# Altium PCB PCB1.PcbDoc
Units mil, origin at the board's own origin, x right, y up, seen from the top; angles counter-clockwise.
Board outline 1982 x 2318 mil, 4 copper layers (Top Layer, GND, GND_SIG, Bottom Layer), stack 23.756 mil thick; 61 components, 52 nets, 290 pads, 248 vias.
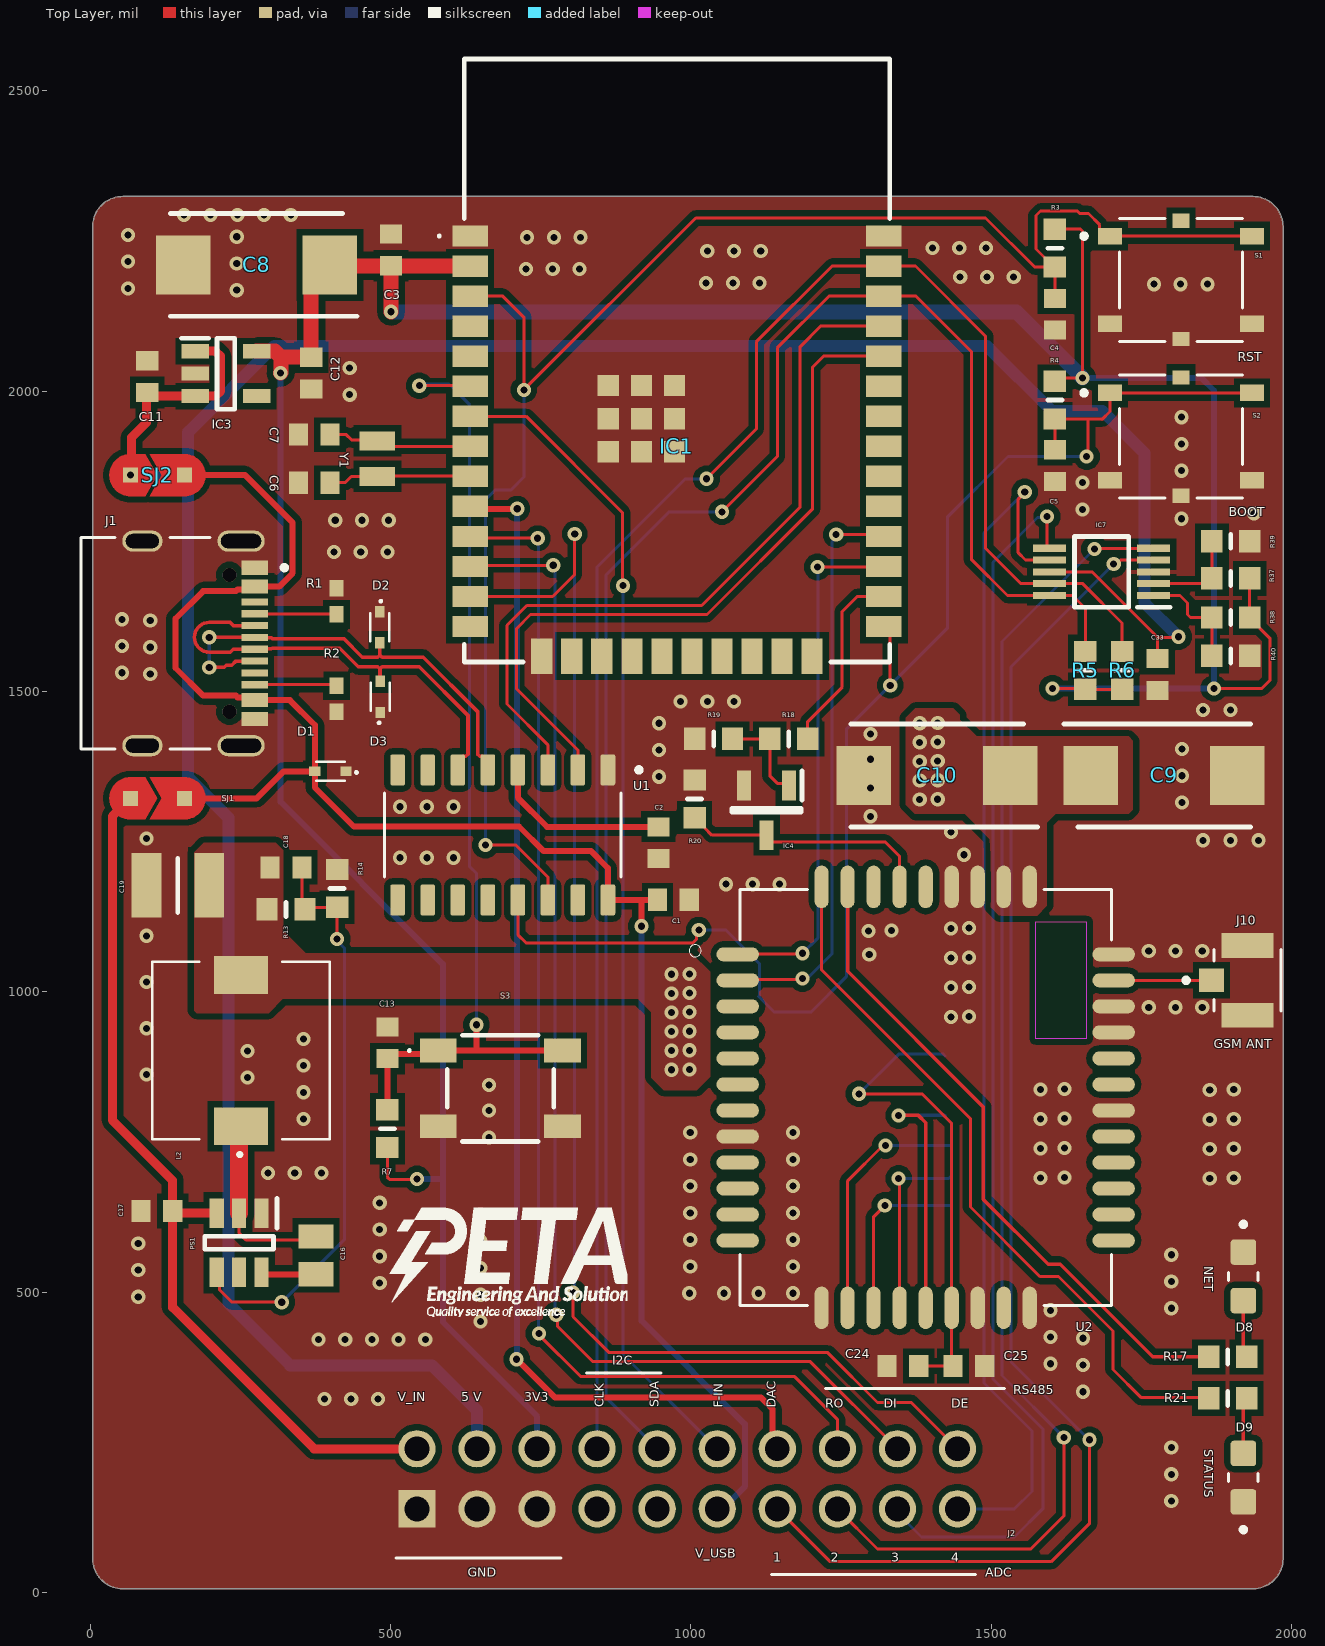
[diagram p0: Top Layer view]
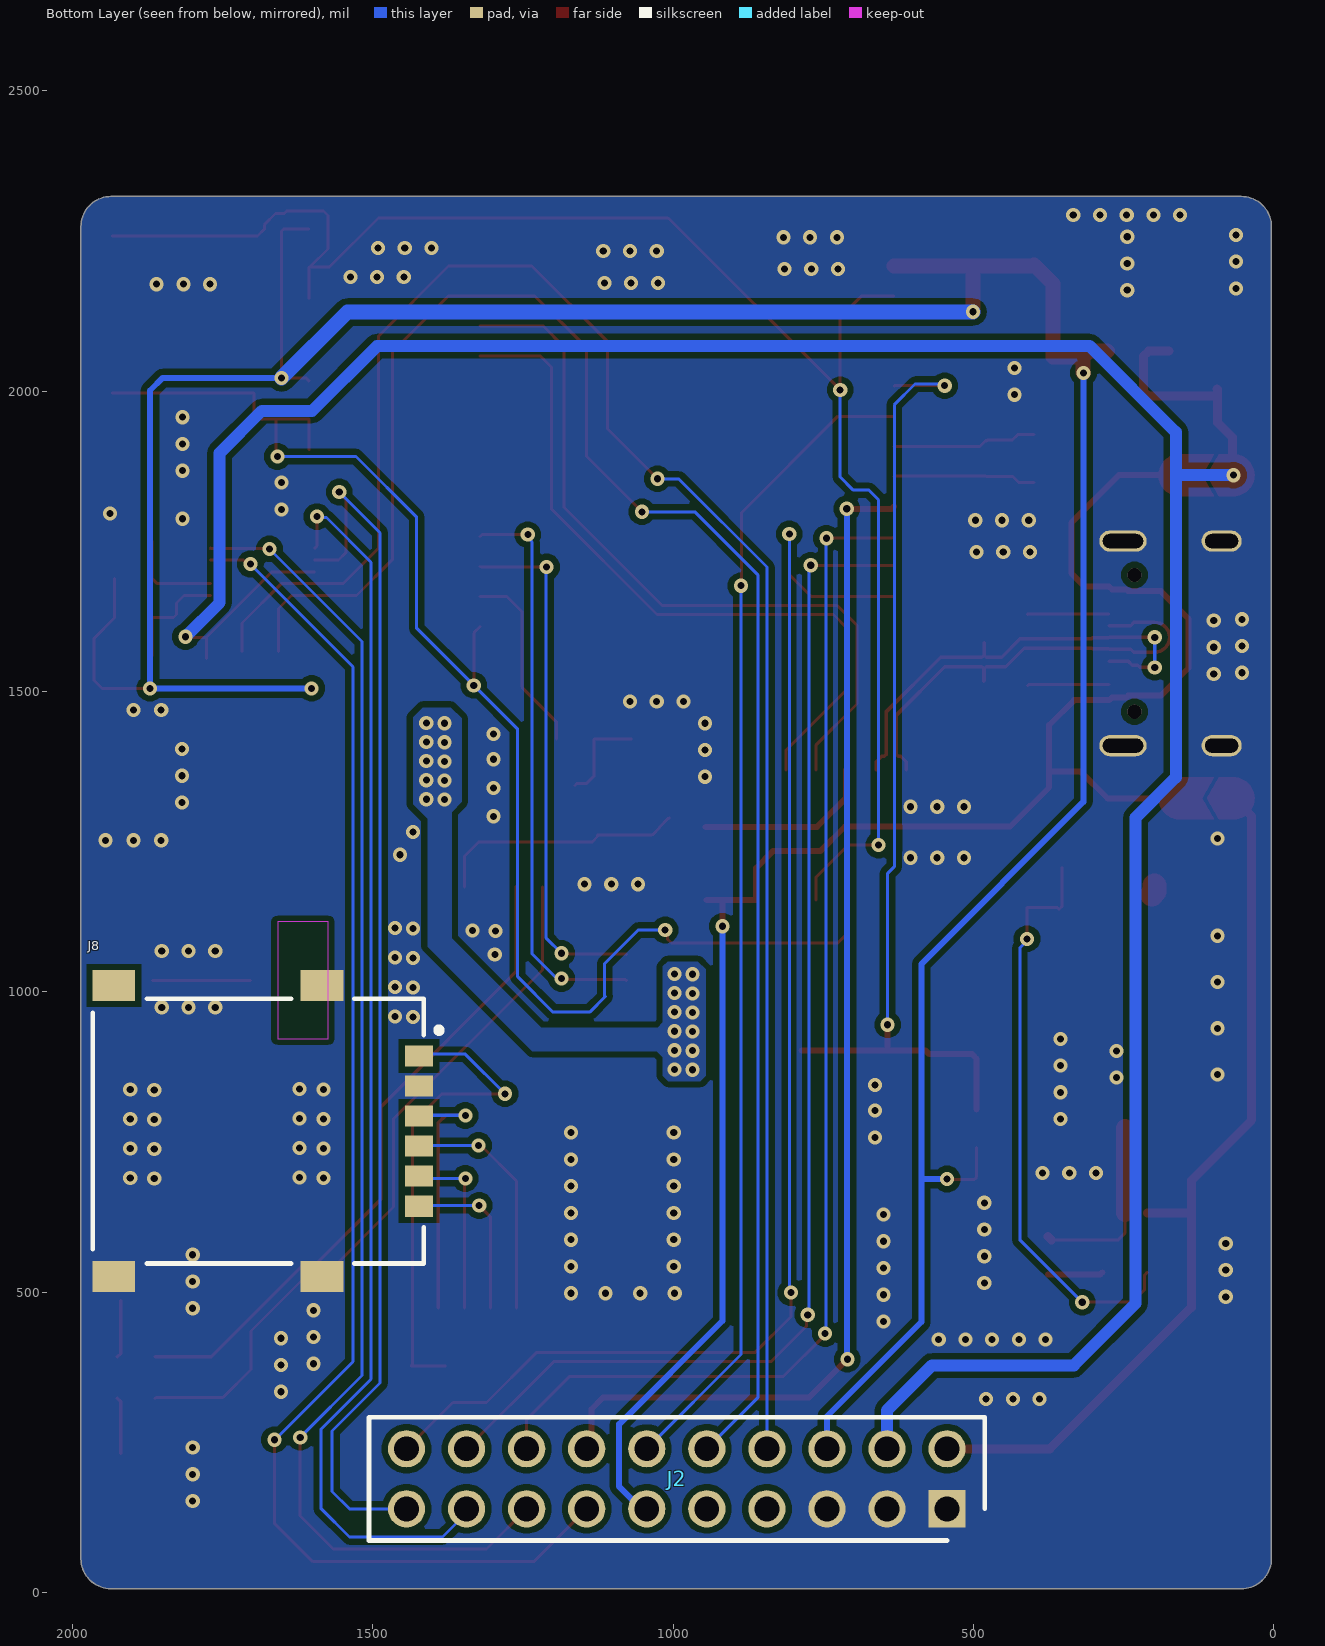
[diagram p1: Bottom Layer view, seen from below]
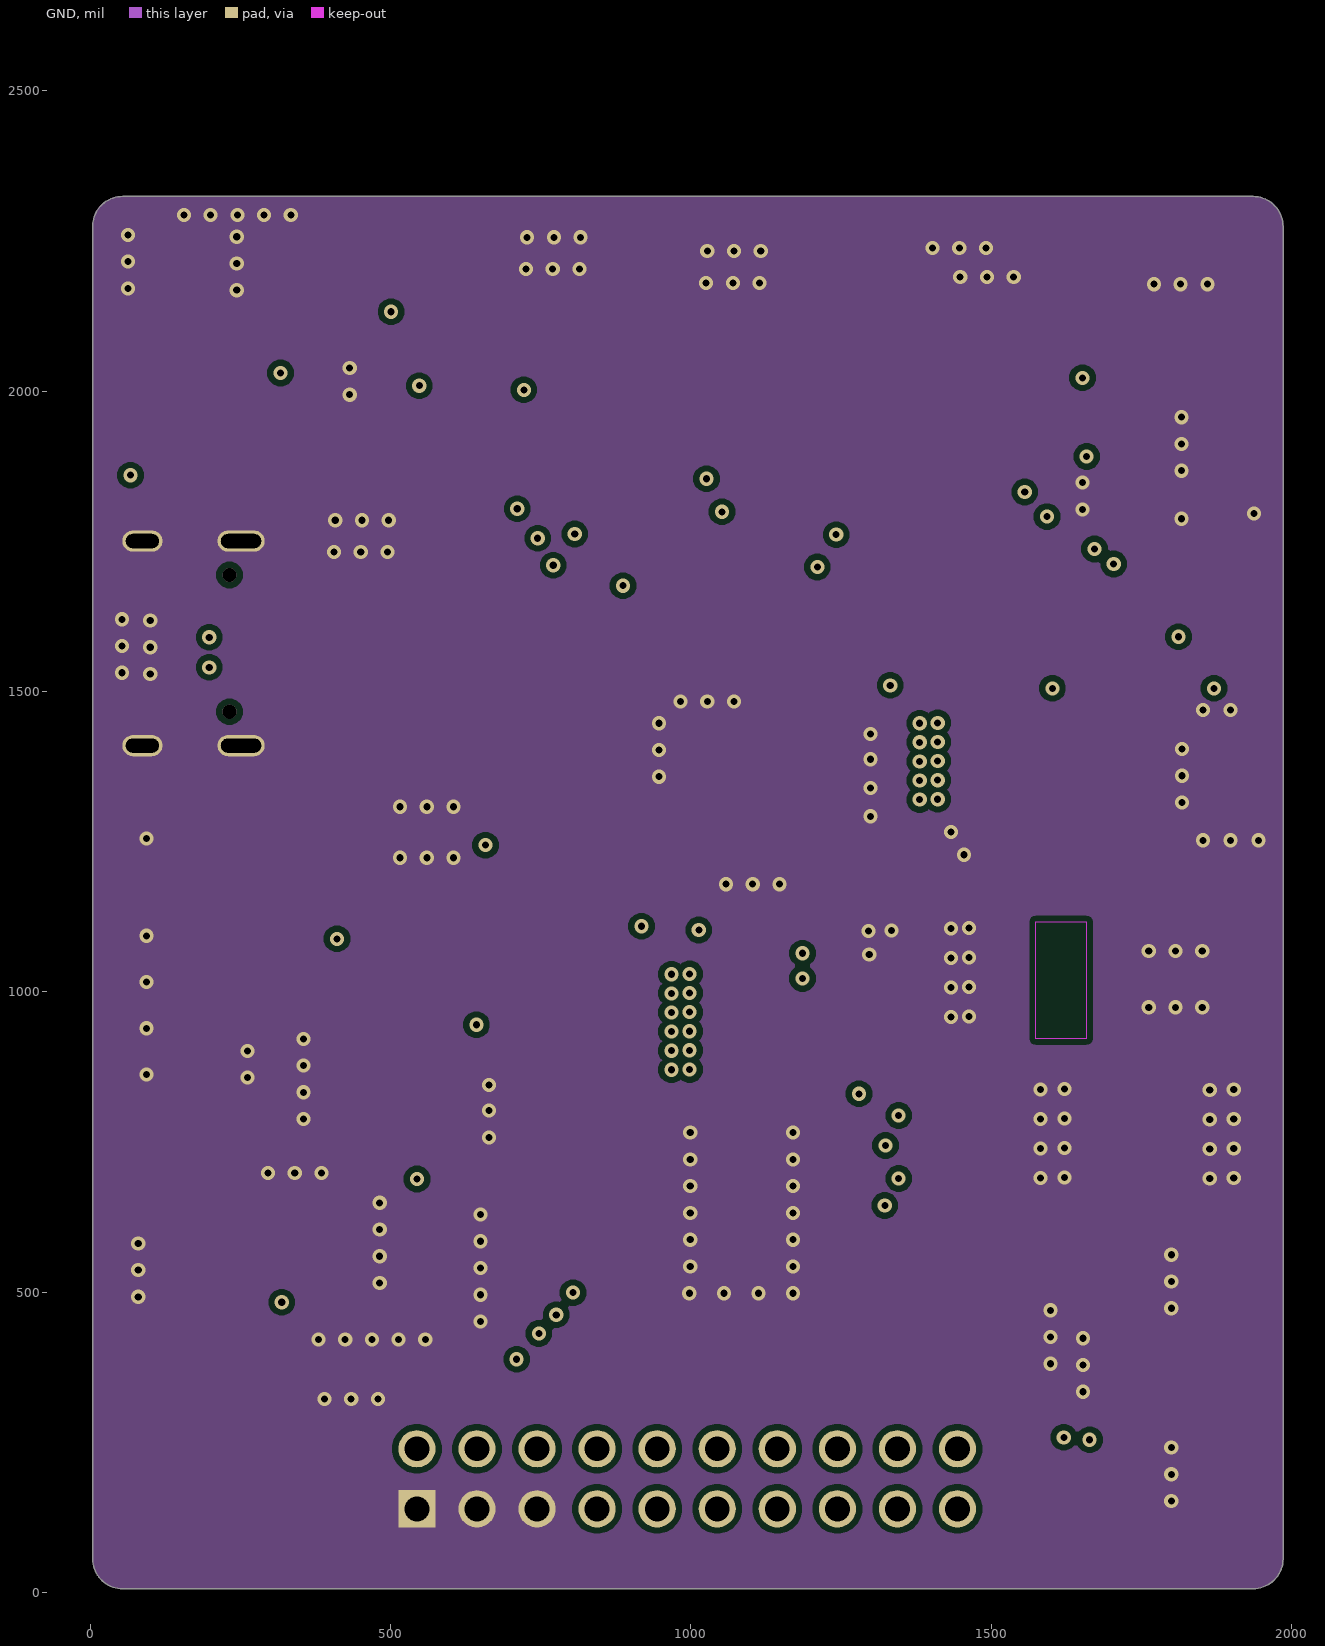
[diagram p2: GND]
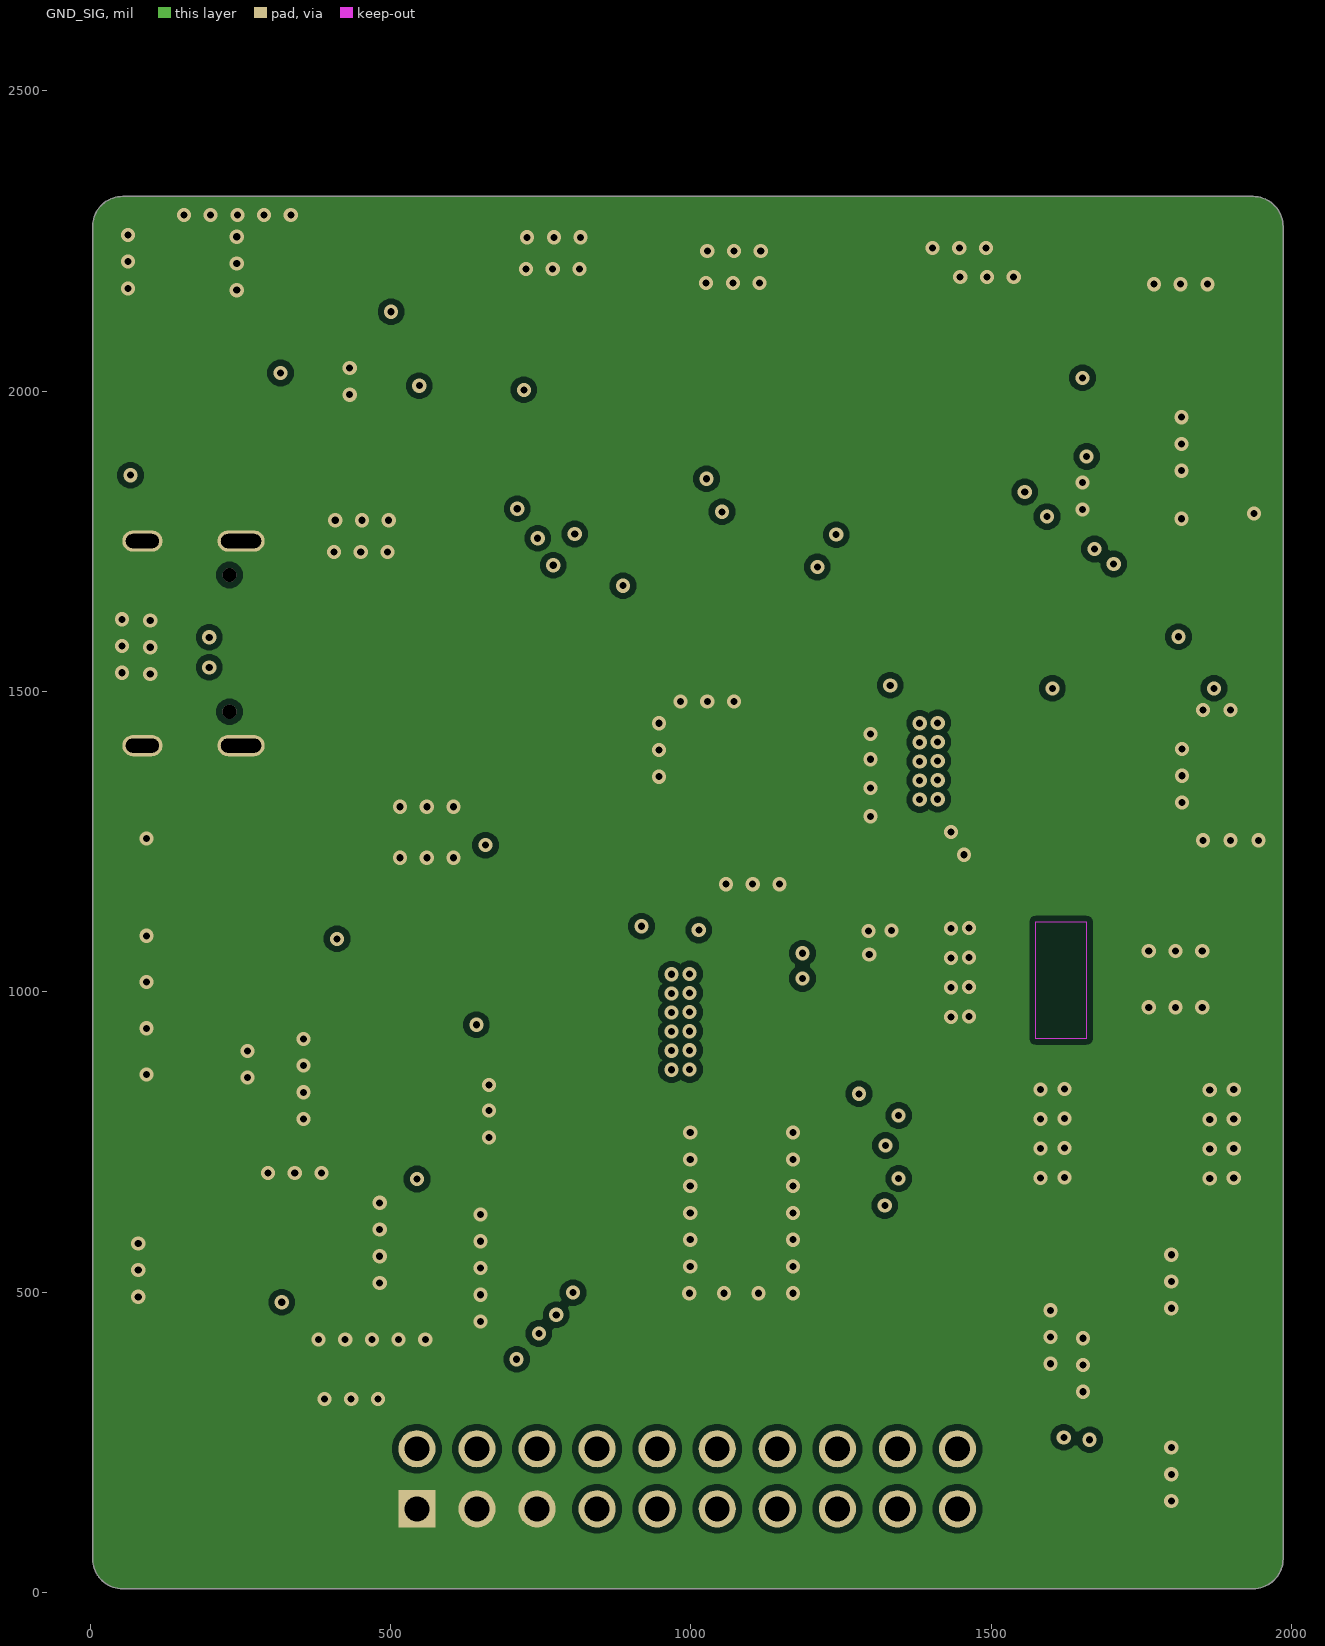
[diagram p3: GND_SIG]
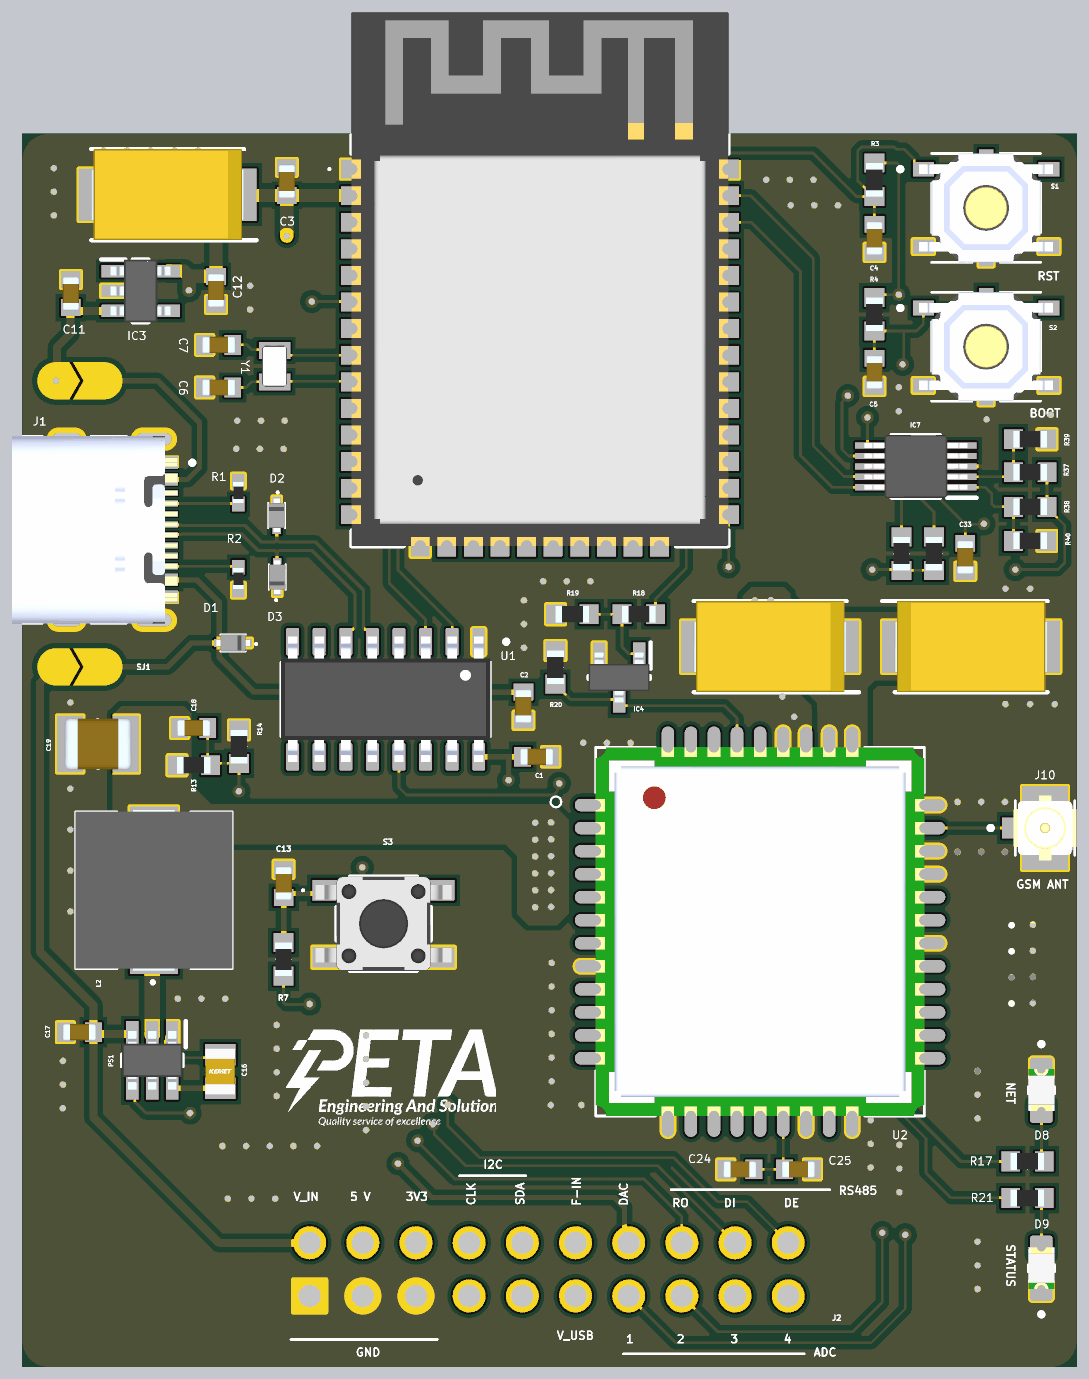
[diagram p4: 3D render of the assembled board from above, using the file's embedded part models]

## Layer stack, top to bottom
Top Solder: solder mask 0.4, Solder Resist, Dk 3.5
Top Layer: signal copper 1.4
Dielectric 2: prepreg 2.8, PP-006, Dk 4.1
GND: signal copper 1.378
Dielectric 1: dielectric 12.6, FR-4, Dk 4.8
GND_SIG: signal copper 1.378
Dielectric 3: prepreg 2.8, PP-006, Dk 4.1
Bottom Layer: signal copper 1.4
Bottom Solder: solder mask 0.4, Solder Resist, Dk 3.5

## Board outline
4,56 4,1120 4,2274 cw(c54,2274) 54,2324 1936,2324 cw(c1936,2274) 1986,2274 1986,56 cw(c1936,56) 1936,6 54,6 cw(c54,56)

## Design rules (kind name [scope] priority, off if disabled: settings)
Clearance [All] p1: gap=10 ignorepadtopadclearanceinfootprint=TRUE except(0: Arc-Hole Track-Hole SMDPad-Hole THPad-Hole Via-Hole Fill-Hole Poly-Hole Region-Hole Text-Hole)
DiffPairsRouting [All] p1: maxlimit=19.68 minlimit=5.91 mostfreqgap=10 toplayer_minwidth=5.91 toplayer_maxwidth=15 toplayer_prefwidth=15 midlayer1_mingap=10 midlayer1_maxgap=10 midlayer1_minwidth=15 midlayer1_maxwidth=15 midlayer1_prefwidth=15 midlayer2_mingap=10 midlayer2_maxgap=10 midlayer2_minwidth=15 midlayer2_maxwidth=15 midlayer2_prefwidth=15 bottomlayer_minwidth=5.91 bottomlayer_maxwidth=15 bottomlayer_prefwidth=15 maxuncoupledlength=500
PlaneConnect [All] p1: planeconnectstyle=Direct reliefexpansion=20 reliefentries=4 reliefconductorwidth=10 reliefairgap=10
PolygonConnect [All] p1: connectstyle=Direct reliefconductorwidth=10 reliefentries=4 polygonreliefangle="90 Angle" airgapwidth=10
RoutingVias [All] p1: holewidth=11.81 width=23.62 viastyle="Through Hole" minholewidth=11.81 minwidth=23.62 maxholewidth=118.11 maxwidth=236.22
SolderMaskExpansion [All] p1: expansion=4 istentingtop=FALSE
Width [All] p1: maxlimit=80 minlimit=5 preferedwidth=10
28 further rules are at their usual default settings.

## Classes and differential pairs
component class PWR: C11 C12 C16 C17 C18 C19 IC3 L2 PS1 R13 R14 SJ1 SJ2
component class programmer: C1 C2 D1 D2 D3 J1 R1 R2 U1
component class MCU: C3 C4 C5 C6 C7 C8 C13 IC1 J2 R3 R4 R5 R6 R7 S1 S2 S3 Y1
component class GSM: C9 C10 C24 C25 D8 D9 IC4 J8 J10 R17 R18 R19 R20 R21 U2
component class ADC: C33 IC7 R37 R38 R39 R40
differential pair USB: +USB_P -USB_N

## Components (designator, comment, footprint, x,y, rotation, side; value= is the part's Value field where it differs from the comment)
C1 "0.1 uF" CAP0603 971,1153 r180 top
C2 "0.1 uF" CAP0603 946,1248 r90 top
C3 "0.1 uF" CAP0603 501,2235 r90 top
C4 "0.1 uF" CAP0603 1606.2,2128 r270 top
C5 "0.1 uF" CAP0603 1606.2,1876 r270 top
C6 "1.5 pF" CAP0603 373,1847.47 r0 top
C7 "1.5 pF" CAP0603 373,1927.47 r0 top
C8 "TPSD227K010R0100" CAPPM7344X310N 277,2210 r180 top
C9 "TPSD227K010R0100" CAPPM7344X310N 1788,1360 r0 top
C10 "TPSD227K010R0100" CAPPM7344X310N 1410,1360 r180 top
C11 "2.2 uF" CAP0603 95,2024 r90 top
C12 "2.2 uF" CAP0603 368,2030 r270 top
C13 "0.1 uF" CAP0603 495,915 r90 top
C16 "C0805C104M5RAC-TU" CAPC2012X88N 376,561 r270 top
C17 "C5750X5R1H106K230KA" CAP0603 111,635 r0 top
C18 "GRM0335C1E560JA01D" CAP0603 326,1207 r180 top
C19 "GRM32ER61C476KE15L" CAPC3225X270N 146,1177 r0 top
C24 "2.2 uF" CAP0603 1353,377 r0 top
C25 "2.2 uF" CAP0603 1463,377 r180 top
C33 "0.1 uF" CAP0603 1777,1528.11 r270 top
D1 "LESD5D5.0CT1G" LESD5D50CT1G 400,1367 r180 top
D2 "LESD5D5.0CT1G" LESD5D50CT1G 482,1606.87 r270 top
D3 "LESD5D5.0CT1G" LESD5D50CT1G 483,1490.87 r90 top
D8 "LED_SMD" LEDSC125X200X90-2N 1920,526 r270 top
D9 "LED_SMD" LEDSC125X200X90-2N 1920,191 r90 top
IC1 "ESP32-WROOM-32E-N8" ESP32WROOM32EN8 976.94,2050.97 r0 top
IC3 "AP2112K-1.2TRG1" SOT95P285X140-5N 226,2029 r0 top
IC4 "MMBT2222ALT1G" SOT96P237X111-3N 1126,1302 r270 top
IC7 "ADS1115IDGSR" SOP50P490X110-10N 1684,1699 r180 top
J1 "TYPE-C-31-M-12" HRO_TYPE-C-31-M-12 87,1580 r270 top
J2 "10-89-7200" HDRV20W87P254_2X10_2553X508X864P 544,139 r180 bottom
J8 "SIM8060-6-1-14-00-A" "GCT_SIM8060-6-1-14-00-A - GND PAD LESS" 1691,768 r270 bottom
J10 "CONUFL001-SMD" LINX_CONUFL001-SMD 1927,1019 r270 top
L2 "PA4302.103NLT" PA4302103NLT 251,902 r180 top
PS1 "TPS54202DDCR" SOT95P280X110-6N 248,582 r270 top
R1 "CRCW0402100KFKEDHP" RESC1005X40N 410,1649.87 r90 top
R2 "CRCW0402100KFKEDHP" RESC1005X40N 410,1487.87 r90 top
R3 "10K" RES0603 1606,2238 r90 top
R4 "10K" RES0603 1606,1985 r90 top
R5 "4.7K" RES0603 1657,1535 r270 top
R6 "4.7K" RES0603 1718,1535 r270 top
R7 "10K" RES0603 494.8,772 r270 top
R13 "CRCW0402100KFKEDHP" RES0603 326,1137 r180 top
R14 "CRCW040216K9FKEDHP" RES0603 411,1172 r270 top
R17 "1K" RES0603 1893.89,392 r0 top
R18 "4.7K" RES0603 1163,1421 r0 top
R19 "47K" RES0603 1038,1421 r0 top
R20 "NC" RES0603 1006.2,1321 r90 top
R21 "1K" RES0603 1893.89,323 r0 top
R37 "10K" RES0603 1899,1688 r180 top
R38 "10K" RES0603 1899,1623 r180 top
R39 "NC" RES0603 1899,1750 r0 top
R40 "NC" RES0603 1899,1559 r0 top
S1 "PTS526_SMG15_SMTR2_LFS" SW_PTS526_SMG15_SMTR2_LFS 1816.11,2185.17 r0 top
S2 "PTS526_SMG15_SMTR2_LFS" SW_PTS526_SMG15_SMTR2_LFS 1816.11,1924.17 r0 top
S3 "PTS647SN50SMTR2N_LFS" PTS647SK50SMTR2LFS 683,839 r0 top
SJ1 "SOLDER_JUMPER_1206" JUMP_SOLDER_JUMPER_1206 112,1322 r180 top
SJ2 "SOLDER_JUMPER_1206" JUMP_SOLDER_JUMPER_1206 112,1860 r180 top
U1 "CH340C" SOIC127P600X180-16N 687,1261 r270 top
U2 "SIM800C" LCC110P1570X1760X250-42N 1391,824 r0 top
Y1 "CM8V-T1A-32.768KHZ-6PF-20PPM-TA-QC" XTAL_CM8V-T1A-32.768KHZ-6PF-20PPM-TA-QC 478,1887.47 r270 top

## Footprints (in the part's own frame and the unit in brackets; to place one, negate y for a bottom-side part, rotate by r counter-clockwise, add the part's x,y. Pads: shape width x height; smd on the part's side, far side on the other; paste and mask are expansions set on the pad)
CAP0603 [mm]
  rect 0.81x0.94 smd: 1(-0.67,0) 2(0.67,0)
  body extent -0.8,-0.4 0.8,0.4, height 0.9
CAPC2012X88N [mm]
  rect 1.02x1.47 smd: 1(-0.8,0) 2(0.8,0)
  body extent -1.1,-0.73 1.1,0.72, height 0.88
CAPC3225X270N [mm]
  rect 1.26x2.72 smd: 1(-1.33,0) 2(1.33,0)
  silkscreen extent 0,-1.15 0,1.15, body extent -1.6,-1.25 1.6,1.25, height 2.7
CAPPM7344X310N [mm]
  rect 2.3x2.5 smd: 1(-3.1,0) 2(3.1,0)
  silkscreen extent -4.25,-2.17 3.65,2.17, body extent -3.65,-2.17 3.65,2.17, height 3.1
ESP32WROOM32EN8 [mm]
  rect 1.5x0.9 smd: 1(-8.75,5.26) 2(-8.75,3.99) 3(-8.75,2.72) 4(-8.75,1.45) 5(-8.75,0.18) 6(-8.75,-1.09) 7(-8.75,-2.36) 8(-8.75,-3.63) 9(-8.75,-4.9) 10(-8.75,-6.17) 11(-8.75,-7.44) 12(-8.75,-8.71) 13(-8.75,-9.98) 14(-8.75,-11.25) 25(8.75,-11.25) 26(8.75,-9.98) 27(8.75,-8.71) 28(8.75,-7.44) 29(8.75,-6.17) 30(8.75,-4.9) 31(8.75,-3.63) 32(8.75,-2.36) 33(8.75,-1.09) 34(8.75,0.18) 35(8.75,1.45) 36(8.75,2.72) 37(8.75,3.99) 38(8.75,5.26)
  rect 0.9x1.5 smd: 15(-5.715,-12.5) 16(-4.445,-12.5) 17(-3.175,-12.5) 18(-1.905,-12.5) 19(-0.635,-12.5) 20(0.635,-12.5) 21(1.905,-12.5) 22(3.175,-12.5) 23(4.445,-12.5) 24(5.715,-12.5)
  rect 0.9x0.9 smd: 39(-2.9,-1.06) 40(-2.9,-2.46) 41(-2.9,-3.86) 42(-1.5,-3.86) 43(-0.1,-3.86) 44(-0.1,-2.46) 45(-0.1,-1.06) 46(-1.5,-1.06) 47(-1.5,-2.46)
  silkscreen extent -10.1,-12.75 9,12.75, body extent -9,-12.75 9,12.75, height 3.13
"GCT_SIM8060-6-1-14-00-A - GND PAD LESS" [mm]
  rect 0.9x1.2 smd: C1(-3.175,6.8) C2(-0.635,6.8) C3(1.905,6.8) C5(-1.905,6.8) C6(0.635,6.8) C7(3.175,6.8)
  rect 1.3x1.8 smd: S1(-6.15,2.7) S2(6.15,2.7) S3(6.15,-6.1) SW(-6.15,-6.1)
  silkscreen extent -5.6,-7 5.6,7.76, body extent -6.22,-6.92 6.18,7.18, height 1.4
HDRV20W87P254_2X10_2553X508X864P [mm]
  rect 1.575x1.575 hole 1.05: 1(0,0)
  round 1.575 hole 1.05: 2(0,2.54) 3(-2.54,0) 4(-2.54,2.54) 5(-5.08,0) 6(-5.08,2.54) 7(-7.62,0) 8(-7.62,2.54) 9(-10.16,0) 10(-10.16,2.54) 11(-12.7,0) 12(-12.7,2.54) 13(-15.24,0) 14(-15.24,2.54) 15(-17.78,0) 16(-17.78,2.54) 17(-20.32,0) 18(-20.32,2.54) 19(-22.86,0) 20(-22.86,2.54)
  silkscreen extent -24.45,-1.34 1.59,3.88, body extent -24.13,-1.27 1.27,3.81, height 8.45
HRO_TYPE-C-31-M-12 [mm]
  rect 0.6x1.14 smd mask+0.05: A1_B12(-3.2,4.75) A4_B9(-2.4,4.75) B1_A12(3.2,4.75) B4_A9(2.4,4.75)
  rect 0.3x1.14 smd mask+0.05: A5(-1.25,4.75) A6(-0.25,4.75) A7(0.25,4.75) A8(1.25,4.75) B5(1.75,4.75) B6(0.75,4.75) B7(-0.75,4.75) B8(-1.75,4.75)
  oval 0.9x2 hole 0.6 slot 1.7 at 90 deg: S1(-4.325,4.17) S2(4.325,4.17)
  oval 0.9x1.7 hole 0.6 slot 1.4 at 90 deg: S3(-4.325,0) S4(4.325,0)
  round 0.6 hole 0.6 unplated: ""(-2.89,3.68) ""(2.89,3.68)
  silkscreen extent -4.47,-2.6 4.47,6.1, body extent -4.47,-2.6 4.47,5.31, height 3.31
JUMP_SOLDER_JUMPER_1206 [mil]
  rect 25x25 smd paste-39.37 mask+0: 1(-45,0) 2(45,0)
  Top Layer region: -7.01,0 12.99,-35 -45,-35 -46.85,-34.96 -48.66,-34.8 -50.47,-34.57 -52.28,-34.25 -54.06,-33.82 -55.83,-33.27 -57.56,-32.68 -59.25,-31.97 -60.91,-31.18 -62.48,-30.31 -64.06,-29.37 -65.59,-28.31 -67.01,-27.2 -68.43,-26.02 -69.76,-24.76 -71.02,-23.43 -72.2,-22.01 -73.31,-20.59 -74.37,-19.06 -75.31,-17.48 -76.18,-15.91 -76.97,-14.25 -77.68,-12.56 -78.27,-10.83 -78.82,-9.06 -79.25,-7.28 -79.57,-5.47 -79.8,-3.66 -79.96,-1.85 -80,0 -79.96,1.85 -79.8,3.66 -79.57,5.47 -79.25,7.28 -78.82,9.06 -78.27,10.83 -77.68,12.56 -76.97,14.25 -76.18,15.91 -75.31,17.48 -74.37,19.06 -73.31,20.59 -72.2,22.01 -71.02,23.43 -69.76,24.76 -68.43,26.02 -67.01,27.2 -65.59,28.31 -64.06,29.37 -62.48,30.31 -60.91,31.18 -59.25,31.97 -57.56,32.68 -55.83,33.27 -54.06,33.82 -52.28,34.25 -50.47,34.57 -48.66,34.8 -46.85,34.96 -45,35 12.99,35
  Top Layer region: 46.85,34.96 48.66,34.8 50.47,34.57 52.28,34.25 54.06,33.82 55.83,33.27 57.56,32.68 59.25,31.97 60.91,31.18 62.48,30.31 64.06,29.37 65.59,28.31 67.01,27.2 68.43,26.02 69.76,24.76 71.02,23.43 72.2,22.01 73.31,20.59 74.37,19.06 75.31,17.48 76.18,15.91 76.97,14.25 77.68,12.56 78.27,10.83 78.82,9.06 79.25,7.28 79.57,5.47 79.8,3.66 79.96,1.85 80,0 79.96,-1.85 79.8,-3.66 79.57,-5.47 79.25,-7.28 78.82,-9.06 78.27,-10.83 77.68,-12.56 76.97,-14.25 76.18,-15.91 75.31,-17.48 74.37,-19.06 73.31,-20.59 72.2,-22.01 71.02,-23.43 69.76,-24.76 68.43,-26.02 67.01,-27.2 65.59,-28.31 64.06,-29.37 62.48,-30.31 60.91,-31.18 59.25,-31.97 57.56,-32.68 55.83,-33.27 54.06,-33.82 52.28,-34.25 50.47,-34.57 48.66,-34.8 46.85,-34.96 45,-35 20,-35 0,0 20,35 45,35
LCC110P1570X1760X250-42N [mm]
  oval 1.8x0.6 smd: 1(-7.95,6.05) 2(-7.95,4.95) 3(-7.95,3.85) 4(-7.95,2.75) 5(-7.95,1.65) 6(-7.95,0.55) 7(-7.95,-0.55) 8(-7.95,-1.65) 9(-7.95,-2.75) 10(-7.95,-3.85) 11(-7.95,-4.95) 12(-7.95,-6.05) 22(7.95,-6.05) 23(7.95,-4.95) 24(7.95,-3.85) 25(7.95,-2.75) 26(7.95,-1.65) 27(7.95,-0.55) 28(7.95,0.55) 29(7.95,1.65) 30(7.95,2.75) 31(7.95,3.85) 32(7.95,4.95) 33(7.95,6.05)
  oval 0.6x1.8 smd: 13(-4.4,-8.9) 14(-3.3,-8.9) 15(-2.2,-8.9) 16(-1.1,-8.9) 17(0,-8.9) 18(1.1,-8.9) 19(2.2,-8.9) 20(3.3,-8.9) 21(4.4,-8.9) 34(4.4,8.9) 35(3.3,8.9) 36(2.2,8.9) 37(1.1,8.9) 38(0,8.9) 39(-1.1,8.9) 40(-2.2,8.9) 41(-3.3,8.9) 42(-4.4,8.9)
  Keep-Out Layer region: 6.8,2.483 4.656,2.483 4.656,7.43 6.8,7.43
  silkscreen extent -10,-8.8 7.85,8.8, body extent -7.85,-8.8 7.85,8.8, height 2.5
LEDSC125X200X90-2N [mm]
  rrect25% 1.07x1.08 smd: A(1.025,0) C(-1.025,0)
  silkscreen extent -2.3,-0.63 0.17,0.63, body extent -1,-0.63 1,0.63, height 0.7
LESD5D50CT1G [mm]
  rect 0.48x0.4 smd: 1(-0.66,0) 2(0.66,0)
  silkscreen extent -1.15,-0.4 0.6,0.4, body extent -0.8,-0.4 0.8,0.4, height 0.6
LINX_CONUFL001-SMD [mm]
  rect 1x1.05 smd: 1(0,-1.525)
  rect 1.05x2.2 smd: 2(-1.475,0) 3(1.475,0)
  silkscreen extent -1.3,-2.7 1.3,1.42, body extent -1.55,-1.5 1.55,1.5, height 1.3
PA4302103NLT [mm]
  rect 2.3x1.6 smd: 1(0,3.2) 2(0,-3.2)
  silkscreen extent -3.75,-3.75 3.75,4.45, body extent -3.75,-3.84 3.75,3.84, height 5.7
PTS647SK50SMTR2LFS [mm]
  rect 1.55x1 smd: 1(-2.625,1.6) 2(2.625,1.6) 3(-2.625,-1.6) 4(2.625,-1.6)
  silkscreen extent -3.9,-2.25 2.25,2.25, body extent -3.25,-2.25 3.25,2.25, height 5
RES0603 [mm]
  rect 0.9x0.95 smd: 1(-0.8,0) 2(0.8,0)
  silkscreen extent 0,-0.3 0,0.3, body extent -0.8,-0.4 0.8,0.4, height 0.55
RESC1005X40N [mm]
  rect 0.7x0.6 smd: 1(-0.55,0) 2(0.55,0)
  body extent -0.5,-0.25 0.5,0.25, height 0.4
SOIC127P600X180-16N [mm]
  rrect25% 1.31x0.62 smd: 1(-2.75,4.445) 2(-2.75,3.175) 3(-2.75,1.905) 4(-2.75,0.635) 5(-2.75,-0.635) 6(-2.75,-1.905) 7(-2.75,-3.175) 8(-2.75,-4.445) 9(2.75,-4.445) 10(2.75,-3.175) 11(2.75,-1.905) 12(2.75,-0.635) 13(2.75,0.635) 14(2.75,1.905) 15(2.75,3.175) 16(2.75,4.445)
  silkscreen extent -2.85,-5 1.78,5.85, body extent -3,-5 3,5, height 1.8
SOP50P490X110-10N [mm]
  rect 1.4x0.3 smd: 1(-2.2,1) 2(-2.2,0.5) 3(-2.2,0) 4(-2.2,-0.5) 5(-2.2,-1) 6(2.2,-1) 7(2.2,-0.5) 8(2.2,0) 9(2.2,0.5) 10(2.2,1)
  silkscreen extent -2.9,-1.5 1.15,1.5, body extent -2.46,-1.5 2.46,1.5, height 1.1
SOT95P280X110-6N [mm]
  rect 1.25x0.6 smd: 1(-1.25,0.95) 2(-1.25,0) 3(-1.25,-0.95) 4(1.25,-0.95) 5(1.25,0) 6(1.25,0.95)
  silkscreen extent -1.88,-1.45 0.28,1.6, body extent -1.4,-1.45 1.4,1.45, height 1.1
SOT95P285X140-5N [mm]
  rect 1.15x0.6 smd: 1(-1.3,0.95) 2(-1.3,0) 3(-1.3,-0.95) 4(1.3,-0.95) 5(1.3,0.95)
  silkscreen extent -1.88,-1.5 0.38,1.5, body extent -1.43,-1.5 1.43,1.5, height 1.4
SOT96P237X111-3N [mm]
  rect 1.25x0.6 smd: 1(-1.05,0.955) 2(-1.05,-0.955) 3(1.05,0)
  silkscreen extent -1.68,-1.46 0.08,1.51, body extent -1.18,-1.46 1.18,1.46, height 1.11
SW_PTS526_SMG15_SMTR2_LFS [mm]
  rect 1x0.7 smd: 1(-3,1.85) 2(3,1.85) 3(-3,-1.85) 4(3,-1.85)
  rect 0.7x0.6 smd: G1(0,2.5) G2(0,-2.5)
  silkscreen extent -4.2,-2.6 2.6,2.6, body extent -3.2,-2.6 3.2,2.6, height 1.7
XTAL_CM8V-T1A-32.768KHZ-6PF-20PPM-TA-QC [mm]
  rect 0.8x1.5 smd: 1(-0.75,0) 2(0.75,0)
  body extent -1,-0.6 1,0.6, height 0.6

## Part data
C1 C2 C3 C4 C5 C6 C7 C11 C12 C13 C24 C25 C33: library part CC0603KRX7R9BB104, "Capacitor", Manufacturer_Name=YAGEO, Mouser Part Number=603-CC603KRX7R9BB104, Arrow Part Number=CC0603KRX7R9BB104, Arrow Price/Stock=https://www.arrow.com/en/products/cc0603krx7r9bb104/yageo?utm_currency=USD&region=europe, Datasheet Link=https://componentsearchengine.com/Datasheets/2/CC0603KRX7R9BB104.pdf, Height=0.9mm, Manufacturer_Part_Number=CC0603KRX7R9BB104, Mouser Price/Stock=https://www.mouser.co.uk/ProductDetail/YAGEO/CC0603KRX7R9BB104?qs=vTakOoo5QyLvVCYM2ge8LQ%3D%3D
C8 C9 C10: "Capacitor Polarised", Manufacturer_Name="Kyocera AVX", Mouser Part Number=581-TPSD227K010R0100, Arrow Part Number=TPSD227K010R0100, Arrow Price/Stock=https://www.arrow.com/en/products/tpsd227k010r0100/avx, Datasheet Link=https://componentsearchengine.com/Datasheets/2/TPSD227K010R0100.pdf, Height=3.1mm, Manufacturer_Part_Number=TPSD227K010R0100, Mouser Price/Stock=https://www.mouser.co.uk/ProductDetail/KYOCERA-AVX/TPSD227K010R0100?qs=VG9BpzG3P7aRGNUSeWjfzQ%3D%3D
C16: "Capacitor", Manufacturer_Name="Yageo Group", Arrow Part Number=C0805C104M5RAC-TU, Arrow Price/Stock=https://www.arrow.com/en/products/c0805c104m5ractu/kemet-corporation?region=nac, Datasheet Link=https://connect.kemet.com:7667/gateway/IntelliData-ComponentDocumentation/1.0/download/specsheet/C0805C104M5RACTU, Height=0.88mm, Manufacturer_Part_Number=C0805C104M5RAC-TU
C17: "Capacitor", Manufacturer_Name=TDK, Mouser Part Number=810-C5750X5R1H106K, Arrow Part Number=C5750X5R1H106K230KA, Arrow Price/Stock=https://www.arrow.com/en/products/c5750x5r1h106k230ka/tdk?region=nac, Datasheet Link=https://product.tdk.com/system/files/dam/doc/product/capacitor/ceramic/mlcc/catalog/mlcc_commercial_general_en.pdf, Height=2.5mm, Manufacturer_Part_Number=C5750X5R1H106K230KA, Mouser Price/Stock=https://www.mouser.co.uk/ProductDetail/TDK/C5750X5R1H106K230KA?qs=NRhsANhppD8lVYAvl0MZ3g%3D%3D
C18: "Capacitor", Manufacturer_Name="Murata Electronics", Mouser Part Number=81-GRM0335C1E560JA1D, Arrow Part Number=GRM0335C1E560JA01D, Arrow Price/Stock=https://www.arrow.com/en/products/grm0335c1e560ja01d/murata-manufacturing, Height=0.33mm, Manufacturer_Part_Number=GRM0335C1E560JA01D, Mouser Price/Stock=https://www.mouser.com/Search/Refine.aspx?Keyword=81-GRM0335C1E560JA1D
C19: "Capacitor", Manufacturer_Name="Murata Electronics", Mouser Part Number=81-GRM32ER61C476KE5L, Arrow Part Number=GRM32ER61C476KE15L, Arrow Price/Stock=https://www.arrow.com/en/products/grm32er61c476ke15l/murata-manufacturing?utm_currency=USD&region=europe, Datasheet Link=https://search.murata.co.jp/Ceramy/image/img/A01X/G101/ENG/GRM32ER61C476KE15-01A.pdf, Height=2.7mm, Manufacturer_Part_Number=GRM32ER61C476KE15L, Mouser Price/Stock=https://www.mouser.co.uk/ProductDetail/Murata-Electronics/GRM32ER61C476KE15L?qs=%252B%2F7tQhzlcy7Im%2F1Gh2YSGQ%3D%3D
D1 D2 D3: "TVS Diode (Bi-directional)", Manufacturer_Name=LRC, Height=0.7mm, Manufacturer_Part_Number=LESD5D5.0CT1G
D8 D9: library part 5990110007F, "Red 633nm LED Indication - Discrete 2.1V 0805 (2012 Metric)", Package="0805 Dialight", Availability="In Stock", Check_prices=https://www.snapeda.com/parts/599-0110-007F/Dialight/view-part/?ref=eda, MF=Dialight, MP=599-0110-007F, Price=None, Purchase-URL=https://pricing.snapeda.com/search/part/599-0110-007F/?ref=eda, SnapEDA_Link=https://www.snapeda.com/parts/599-0110-007F/Dialight/view-part/?ref=snap
IC1: "Integrated Circuit", Manufacturer_Name="Espressif Systems", Mouser Part Number=356-ESP32WRM32E164PH, Datasheet Link=https://www.google.com/url?sa=t&rct=j&q=&esrc=s&source=web&cd=&ved=2ahUKEwjLw4ysybv2AhXFzIUKHZUbB64QFnoECCwQAQ&url=https%3A%2F%2Fwww.espressif.com%2Fsites%2Fdefault%2Ffiles%2Fdocumentation%2Fesp32-wroom-32e_esp32-wroom-32ue_datasheet_en.pdf&usg=AOvVaw1xSL, Height=3.25mm, Manufacturer_Part_Number=ESP32-WROOM-32E-N8, Mouser Price/Stock=https://www.mouser.co.uk/ProductDetail/Espressif-Systems/ESP32-WROOM-32E-N8?qs=Li%252BoUPsLEnsLnZW%252BGLgUhw%3D%3D
IC3: "Integrated Circuit", Manufacturer_Name="Diodes Incorporated", Mouser Part Number=621-AP2112K-1.2TRG1, Arrow Part Number=AP2112K-1.2TRG1, Arrow Price/Stock=https://www.arrow.com/en/products/ap2112k-1.2trg1/diodes-incorporated.html?utm_currency=USD&region=nac, Datasheet Link=https://www.diodes.com/assets/Datasheets/AP2112.pdf, Height=1.4mm, Manufacturer_Part_Number=AP2112K-1.2TRG1, Mouser Price/Stock=https://www.mouser.co.uk/ProductDetail/Diodes-Incorporated/AP2112K-1.2TRG1?qs=dZoB6MK9LKOx%252Blz%2FhgH2SA%3D%3D
IC4: "Integrated Circuit", Manufacturer_Name="Rochester Electronics", Datasheet Link=https://www.onsemi.com/pdf/datasheet/mmbt2222lt1-d.pdf, Height=1.11mm, Manufacturer_Part_Number=MMBT2222ALT1G
IC7: "Integrated Circuit", Manufacturer_Name="Texas Instruments", Mouser Part Number=595-ADS1115IDGSR, Arrow Part Number=ADS1115IDGSR, Arrow Price/Stock=https://www.arrow.com/en/products/ads1115idgsr/texas-instruments.html?utm_currency=USD&region=nac, Datasheet Link=http://www.ti.com/lit/gpn/ADS1115, Height=1.1mm, Manufacturer_Part_Number=ADS1115IDGSR, Mouser Price/Stock=https://www.mouser.co.uk/ProductDetail/Texas-Instruments/ADS1115IDGSR?qs=IK5e5L0zOXjKCJoVMhYO%2FQ%3D%3D
J1: "USB Connectors 24 Receptacle 1 8.94*7.3mm RoHS", Package=Package, Check_prices=https://www.snapeda.com/parts/TYPE-C-31-M-12/HRO+Electronics+Co.%252C+Ltd./view-part/?ref=eda, MF="HRO Electronics Co., Ltd.", MP=TYPE-C-31-M-12, SnapEDA_Link=https://www.snapeda.com/parts/TYPE-C-31-M-12/HRO+Electronics+Co.%252C+Ltd./view-part/?ref=snap
J2: "Connector", Manufacturer_Name=Molex, Mouser Part Number=538-10-89-7200, Datasheet Link=https://www.molex.com/content/dam/molex/molex-dot-com/products/automated/en-us/salesdrawingpdf/702/70280/010897200_sd.pdf?inline, Height=8.64mm, Manufacturer_Part_Number=10-89-7200, Mouser Price/Stock=https://www.mouser.co.uk/ProductDetail/Molex/10-89-7200?qs=oWQp3ZoCHH25CPUgqQXm8A%3D%3D
J8: "6 Position Card Connector NANO SIM Surface Mount, Right Angle Gold", Package="Package Analog Devices", Availability=Unavailable, MF="Global Connector Technology", MP=SIM8060-6-1-14-00-A, Price=None, SnapEDA_Link=https://www.snapeda.com/parts/SIM8060-6-1-14-00-A/Global%20Connector%20Technology/view-part/3075869/?ref=snap
J10 SJ1 SJ2: Package=None, Price=None
  J10: Availability="In Stock", Check_prices=https://www.snapeda.com/parts/CONUFL001-SMD/Linx/view-part/5842340/?ref=eda, MF=Linx, MP=CONUFL001-SMD, SnapEDA_Link=https://www.snapeda.com/parts/CONUFL001-SMD/Linx/view-part/5842340/?ref=snap
  SJ1 SJ2: Availability=Unavailable, MP=SOLDER_JUMPER_1206
L2: "Inductor", Manufacturer_Name="Yageo Group", Mouser Part Number=673-PA4302.103NLT, Arrow Part Number=PA4302.103NLT, Arrow Price/Stock=https://www.arrow.com/en/products/pa4302.103nlt/pulse-electronics-corporation?region=nac, Datasheet Link=https://www.mouser.com/datasheet/2/336/-559356.pdf, Height=5.6mm, Manufacturer_Part_Number=PA4302.103NLT, Mouser Price/Stock=https://www.mouser.co.uk/ProductDetail/Pulse-Electronics/PA4302.103NLT?qs=ZU1dyKYMvyPXoPwo6qMOJg%3D%3D
PS1: "Power Supply", Manufacturer_Name="Texas Instruments", Mouser Part Number=595-TPS54202DDCR, Arrow Part Number=TPS54202DDCR, Arrow Price/Stock=https://www.arrow.com/en/products/tps54202ddcr/texas-instruments?utm_currency=USD&region=nac, Datasheet Link=http://www.ti.com/lit/gpn/tps54202, Height=1.1mm, Manufacturer_Part_Number=TPS54202DDCR, Mouser Price/Stock=https://www.mouser.co.uk/ProductDetail/Texas-Instruments/TPS54202DDCR?qs=uP22XH7NdCsJtN%2Fq54jCtQ%3D%3D
R1 R2 R13: "Resistor", Manufacturer_Name=Vishay, Mouser Part Number=71-CRCW0402100KFKEDH, Arrow Part Number=CRCW0402100KFKEDHP, Arrow Price/Stock=https://www.arrow.com/en/products/crcw0402100kfkedhp/vishay?utm_currency=USD&region=nac, Datasheet Link=http://www.vishay.com/docs/20035/dcrcwe3.pdf, Height=0.4mm, Manufacturer_Part_Number=CRCW0402100KFKEDHP, Mouser Price/Stock=https://www.mouser.co.uk/ProductDetail/Vishay-Dale/CRCW0402100KFKEDHP?qs=k2%2FDWSARqgGFakjlJe4Ejw%3D%3D
R3 R4 R5 R6 R7 R17 R18 R19 R20 R21 R37 R38 R39 R40: library part RES, "Resistor", Manufacturer_Name="UNI-ROYAL(Uniroyal Elec)", Manufacturer_Part_Number=0603WAF1001T5E, Datasheet Link=https://datasheet.lcsc.com/szlcsc/Uniroyal-Elec-0603WAF1001T5E_C21190.pdf, Height=0.55mm
R14: "Resistor", Manufacturer_Name=Vishay, Mouser Part Number=71-CRCW040216K9FKEDH, Datasheet Link=http://www.vishay.com/docs/20035/dcrcwe3.pdf, Height=0.4mm, Manufacturer_Part_Number=CRCW040216K9FKEDHP, Mouser Price/Stock=https://www.mouser.com/Search/Refine.aspx?Keyword=71-CRCW040216K9FKEDH
S1 S2: "Tactile Switch SPST-NO Top Actuated Surface Mount", Package=None, Availability="In Stock", Check_prices=https://www.snapeda.com/parts/PTS526%20SMG15%20SMTR2%20LFS/C%2526K/view-part/?ref=eda, MF=C&K, MP="PTS526 SMG15 SMTR2 LFS", Price=None, Purchase-URL="https://pricing.snapeda.com/search/part/PTS526 SMG15 SMTR2 LFS/?ref=eda", SnapEDA_Link=https://www.snapeda.com/parts/PTS526%20SMG15%20SMTR2%20LFS/C%2526K/view-part/?ref=snap
S3: "Switch (4-Pin Push)", Manufacturer_Name=LITTELFUSE, Manufacturer_Part_Number="PTS647SN50SMTR2N LFS", Datasheet Link=https://www.ckswitches.com/media/2567/pts647.pdf
U1: "USB to serial chip CH340", Package=None, Availability="Not in stock", Check_prices=https://www.snapeda.com/parts/CH340C/WCH/view-part/?ref=eda, MF=WCH, MP=CH340C, Price=None, SnapEDA_Link=https://www.snapeda.com/parts/CH340C/WCH/view-part/?ref=snap
U2: "Module: GSM/Bluetooth; GPRS; 2G; 1800MHz, 900MHz; 85.6kbps; SMD", Package=None, Availability="In Stock", Check_prices=https://www.snapeda.com/parts/SIM800C/SIMcom+Wireless+solutions+Co.%252CLtd/view-part/?ref=eda, MF=Simcom, MP=SIM800C, Price=None, SnapEDA_Link=https://www.snapeda.com/parts/SIM800C/SIMcom+Wireless+solutions+Co.%252CLtd/view-part/?ref=snap
Y1: "Tuning Fork Crystal 32.768kHz in SMD 1.2 x 2.0mm package", Package="SMD-2 Micro Crystal", Check_prices=https://www.snapeda.com/parts/CM8V-T1A-32.768kHz-6pF-20PPM-TA-QC/Micro+Crystal/view-part/?ref=eda, MF="Micro Crystal", MP=CM8V-T1A-32.768kHz-6pF-20PPM-TA-QC, SnapEDA_Link=https://www.snapeda.com/parts/CM8V-T1A-32.768kHz-6pF-20PPM-TA-QC/Micro+Crystal/view-part/?ref=snap

## Via types
v1: diameter 23.62, hole 11.81, Top Layer to Bottom Layer, tented both sides, 246 vias
v2: diameter 23.62, hole 11.81, Top Layer to Bottom Layer, 2 vias

## Nets (pads, with @x,y where several pads share a name; then routed paths per layer and width w, separated by ;. In a path a pad name is that pad's centre, name@x,y a point inside that pad or via, vN(x,y) a via of type N, cw(c..) or ccw(c..) an arc to the next point about the centre after c; other vN are vias at no path point)
+3.3: C3.1 C8.1 C12.1 IC1.2 IC3.5 J2.6 R3.2 R4.2 R5.2 R6.2 R7.2 R37.1 R38.1 | length 5640.5
  Top Layer w5: R7.2 494.8,691.2 499,687 543,687 v1(544,688) ; v1(1602,1505) 1655.5,1505 R5.2 R6.2 ; R4.2 1611.5,2022 v1(1652,2022) 1652,2266.34 1648.84,2269.5 R3.2 ; v1(1871,1505) 1950.96,1505 1964,1518.04 1964,1588.51 1930.5,1622.02 R38.1 R37.1
  Top Layer w25: IC3.5 307.56,2066.4 317.58,2056.38 ; v1(317,2030) 317.58,2030.58 317.58,2056.38 ; v2(501,2132) C3.1 ; IC1.2 631.88,2208.62 C3.1 ; 317.58,2056.38 C12.1 368,2178.95 C8.1 400.43,2208.62 C3.1
  Bottom Layer w5: v1(1602,1505) v1@1603.5,1503.5
  Bottom Layer w10: v1(317,2030) 317,1316 587,1046 587,686 ; v1(544,688) 585,688 587,686 ; J2.6 744,293 587,450 587,686 ; v1@1603.5,1503.5 1605,1505 v1(1871,1505) 1871,2001 1850,2022 v1(1652,2022)
  Bottom Layer w25: v2(501,2132) 1542,2132 v1(1652,2022)
+4.1V: C9.1 C10.1 C18.2 C19.2 L2.2 R13.2 U2.34 U2.35 | length 17
  Top Layer w40: C19.2 198.36,1166.8 C19.2@203.17,1162
  other v1: 968,870 998,870.6 968,901.8 998,902.4 968,933.6 998,934.2 968,965.4 998,966 968,997.2 998,997.8 968,1029 998,1029.6 1381,1319.8 1411,1320.4 1381,1351.6 1411,1352.2 1381,1383.4 1411,1384 1381,1415.2 1411,1415.8 1381,1447 1411,1447.6
+5: C11.1 C33.1 IC3.1 IC3.3 IC7.8 J2.4 SJ2.2 | length 4861.8
  Top Layer w5: IC7.8 1668,1699 1777,1590 ; C33.1 1777,1590 ; v1(1812,1591) 1811,1590 1777,1590
  Top Layer w15: v1(67,1860) 69,1862 69,1923 93.96,1947.96 93.96,2002.59 C11.1@95,2003.62 ; C11.1@93.96,1991.6 IC3.3 208.6,1991.6 217,2000 217,2058 208.6,2066.4 IC3.1
  Bottom Layer w20: v1(67,1860) 133,1860 163,1860 ; J2.4 644,303 569,378 333,378 230,481 230,1290 163,1357 163,1860 ; v1(1812,1591) 1755.22,1647.78 1755.22,1896.78 1685,1967 1601,1967 1493,2075 306.5,2075 163,1931.5 163,1860
+VIN: C17.2 J2.2 PS1.3 SJ1.2 | length 1480.4
  Top Layer w15: SJ1.2 37,1292 37,786 137.38,685.62 C17.2 ; PS1.3 141.17,631.21 C17.2 ; J2.2 373,239 137.38,474.62 C17.2
ADC_0: IC7.4 J2.13 | length 2375
  Top Layer w5: J2.13 1232,51 1600,51 1664,115 v1(1664,254) ; v1(1704,1712) 1709.04,1712 1715.72,1718.69 IC7.4
  Bottom Layer w5: v1(1664,254) 1663,254 1533,384 1533,1541 v1(1704,1712)
ADC_1: IC7.5 J2.15 | length 2243.2
  Top Layer w5: J2.15 1311,72 1566,72 1621,127 v1(1621,258) ; v1(1672,1737) 1672.68,1737.69 1769.93,1737.69 IC7.5
  Bottom Layer w5: v1(1621,258) 1518,361 1518,1583 v1(1672,1737)
ADC_2: IC7.6 J2.17 | length 2071.9
  Top Layer w5: v1(1593,1791) 1593,1741.78 1596.41,1738.37 IC7.6
  Bottom Layer w5: J2.17 1344,132 1384,92 1539,92 1586,139 1586,271.79 1503,354.79 1503,1714.99 1577.35,1789.34 1591.34,1789.34 v1(1593,1791)
BOOT: C5.1 IC1.25 R4.1 S2.1 S2.2 U1.13 | length 2431
  Top Layer w5: U1.13 712,1095 726,1081 1003,1081 1009.78,1087.78 1009.78,1099.25 v1(1013.34,1102.81) ; IC1.25 1332,1597.48 v1(1332,1510) ; C5.1 1606,1902.57 R4.1 1661,1953.5 ; v1(1659,1891) 1661,1893 1661,1953.5 ; S2.2 S2.1 1698,1966.14 1684.93,1953.07 1684.5,1953.5 1661,1953.5
  Bottom Layer w5: v1(1013.34,1102.81) 1058.19,1102.81 1114,1047 1114,993 1113.07,992.07 1139.14,966 1200,966 1259,1025 1259,1437 v1(1332,1510) 1427,1605 1427,1790 1528,1891 v1(1659,1891)
BUZZER: IC1.30
DAC_1: IC1.10 J2.14 | length 2026.3
  Top Layer w10: IC1.10 636.5,1804 v1(711,1804) ; v1(710,388) 774,324 1117,324 1136,305 1136,247 J2.14
  Bottom Layer w10: v1(710,388) 710.5,388.5 710.5,1803.5 v1(711,1804)
DBG_RX: IC1.35 U1.3 | length 1259
  Top Layer w5: U1.3 762,1411 694,1479 694,1610 727.06,1643.06 1018.06,1643.06 1182,1807 1182,2074 1216.06,2108.06 IC1.35
DBG_TX: IC1.34 U1.2 | length 1215.2
  Top Layer w5: U1.2 812,1402 710,1504 710,1604.79 733.27,1628.06 1027.06,1628.06 1203,1804 1203,2040 1221.06,2058.06 IC1.34
DE: IC1.13 J2.20 | length 2292
  Top Layer w5: IC1.13 770.06,1658.06 806.69,1694.69 v1(806.69,1762) ; v1(804,499) 804,459 864,399 1228,399 1311,316 1367,316 J2.20
  Bottom Layer w5: v1(804,499) 806.69,501.69 v1(806.69,1762)
DI: IC1.12 J2.18 | length 2059.8
  Top Layer w5: IC1.12 634.39,1710 v1(771,1710) ; v1(776,462) 778.31,459.69 778.31,442.69 837,384 1199,384 J2.18
  Bottom Layer w5: v1(771,1710) 773.5,1707.5 773.5,464.5 v1(776,462)
DIF_ADC: IC7.7 J2.19 | length 2024.4
  Top Layer w5: v1(1556,1832) 1556,1830.83 1545,1819.83 1545,1731 1557.32,1718.69 IC7.7
  Bottom Layer w5: J2.19 1539,139 1568,168 1568,268.57 1488,348.57 1488,1764 v1(1556,1832)
DIGITAL_IN: C13.1 IC1.6 R7.1 S3.1 S3.2 | length 1646.4
  Top Layer w5: v1(548,2009) 631.5,2009 IC1.6
  Top Layer w10: R7.1 495,803.69 C13.1 502.38,896 573.66,896 S3.1 643,901.99 ; v1(643,945) 643,901.99 ; S3.2 643,901.99
  Bottom Layer w5: v1(548,2009) 550.61,2011.61 597.39,2011.61 631.81,1977.19 631.81,1277.23 631.19,1276.61 631.19,1234.73 631.81,1234.11 631.81,1208.19 643,1197 v1(643,945)
FLOAT_IN: IC1.7 J2.12 | length 1944.3
  Top Layer w5: IC1.7 725.94,1958.06 886,1798 886,1677 v2(887,1676)
  Bottom Layer w5: v2(887,1676) 887,396 J2.12
GND: C1.1 C2.1 C3.2 C4.2 C5.2 C6.1 C7.1 C8.2 C9.2 C10.2 C11.2 C12.2 C13.2 C17.1 C19.1 C24.1 C25.1 C33.2 D1.1 D2.1 D3.1 D8.C D9.C IC1.1 IC1.15 IC1.38 IC1.39 IC1.40 IC1.41 IC1.42 IC1.43 IC1.44 IC1.45 IC1.46 IC1.47 IC3.2 IC4.2 IC7.3 J1.A1_B12 J1.B1_A12 J1.S1 J1.S2 J1.S3 J1.S4 J2.1 J2.3 J2.5 J8.C5 J8.S1 J8.S2 J8.S3 J10.2 J10.3 PS1.1 R1.2 R2.1 R14.1 R19.1 R20.2 R39.2 R40.2 S1.3 S1.4 S1.G2 S2.3 S2.4 S2.G2 S3.3 S3.4 U1.1 U2.8 U2.13 U2.19 U2.21 U2.27 U2.30 U2.31 U2.33 U2.36 U2.37
  other v1: 1800,152 1800,196.5 1800,241 390,322 434.5,322 479,322 1653,334 1653,378.5 1599,380.5 380,421 424.5,421 469,421 513.5,421 558,421 1653,423 1599,425 650,451 1599,469.5 1800,473 80,492 650,495.5 997.5,498 1055,498 1112.5,498 1170,498 482,515 1800,517.5 80,536.5 650,540 999,542.57 1170,542.57 482,559.5 1800,562 80,581 650,584.5 999,587.14 1170,587.14 482,604 650,629 999,631.71 1170,631.71 482,648.5 999,676.29 1170,676.29 1864,689 1582,690 1904,689.83 1622,690.83 296,698 340.5,698 385,698 999,720.86 1170,720.86 1864,738.08 1582,739.08 1904,738.92 1622,739.92 664,757.5 999,765.43 1170,765.43 1864,787.17 355,788 1582,788.17 1904,788 1622,789 664,802 355,832.5 1864,836.25 1582,837.25 1904,837.08 1622,838.08 664,844.68 261.81,857 94,862 355,877 261.81,901.5 355,921.5 94,939 1433,958 1463,958.83 1762.43,974 1807,974 1851.57,974 1433,1007.08 1463,1007.92 94,1016 1433,1056.17 1463,1057 1297,1062 1762.43,1068 1807,1068 1851.57,1068 94,1093 1296,1101 1334,1102 1433,1105.25 1463,1106.08 1058.5,1179 1103,1179 1147.5,1179 516,1223 560.5,1223 605,1223 1455,1228 1852.5,1252 1898.75,1252 1945,1252 94,1255 1433,1266 1299,1292 516,1308 560.5,1308 605,1308 1818,1315 1299,1339 947,1358 1818,1359.5 1299,1387 947,1402.5 1818,1404 1299,1429 947,1447 1852.5,1469 1898.75,1469 983,1483 1027.5,1483 1072,1483 100,1529 53,1531 100,1573.5 53,1575.5 100,1618 53,1620 406,1732 450.5,1732 495,1732 408,1785 452.5,1785 497,1785 1817,1787.48 1937.81,1796 1652,1803 1652,1848 1817,1867.5 1817,1912 1817,1956.5 432,1994 432,2038.5 244,2168 63,2171 1771,2178 1815.5,2178 1860,2178 1025.5,2180 1070,2180 1114.5,2180 1448.5,2190 1493,2190 1537.5,2190 725.5,2203 770,2203 814.5,2203 244,2212.5 63,2215.5 1027.5,2233 1072,2233 1116.5,2233 1402.5,2238 1447,2238 1491.5,2238 727.5,2256 772,2256 816.5,2256 244,2257 63,2260 156,2293 200.5,2293 245,2293 289.5,2293 334,2293
I2C_1_CLK: IC1.37 IC7.9 J2.8 R6.1 | length 3143.9
  Top Layer w5: v1(1026,1854) 1109,1937 1109,2082 1235,2208 1321.37,2208 IC1.37 1373.94,2208.06 1491,2091 1491,1738 1549,1680 1596.7,1680 IC7.9 1652.68,1679.31 1718,1614 R6.1
  Bottom Layer w5: J2.8 833.09,249.91 844,260.82 844,1707 991,1854 v1(1026,1854)
I2C_1_SDA: IC1.36 IC7.10 J2.10 R5.1 | length 3076.1
  Top Layer w5: v1(1052,1799) 1144,1891 1144,2072 1230.06,2158.06 IC1.36 1374.94,2158.06 1467,2066 1467,1720 1527.37,1659.63 IC7.10 1635.37,1659.63 1657,1638 R5.1
  Bottom Layer w5: J2.10 859,324 859,1694 964,1799 v1(1052,1799)
LSE_OSC_IN: C7.2 IC1.8 Y1.1 | length 242
  Top Layer w5: C7.2 426.38,1927.47 435.38,1918.47 476.53,1918.47 Y1.1 479.06,1918.06 489.06,1908.06 IC1.8
LSE_OSC_OUT: C6.2 IC1.9 Y1.2 | length 238.2
  Top Layer w5: C6.2 424.38,1847.47 434.85,1857.94 Y1.2 478.96,1858.91 631.6,1858.91 IC1.9
NetC2_2: C2.2 U1.4 | length 300.4
  Top Layer w10: U1.4 712,1323 760.62,1274.38 C2.2
NetC16_1: C16.1 L2.1 PS1.2 | length 314.1
  Top Layer w5: PS1.2 248,598 259,587 C16.1@370.5,587
  Top Layer w15: L2.1@248,773.02 L2.1 ; C16.1@370.5,587 C16.1
  Top Layer w30: PS1.2 L2.1@248,773.02
NetC16_2: C16.2 PS1.6 | length 92
  Top Layer w10: PS1.6 288.69,529.5 C16.2
NetC18_1: C18.1 PS1.4 R13.1 R14.2 | length 975.9
  Top Layer w5: PS1.4 215.39,528 215.39,503.61 236,483 v1(319,483) ; C18.1 352.38,1142.12 R13.1 361,1140.5 R14.2 v1(411,1088)
  Bottom Layer w5: v1(319,483) 423,587 423,1072.69 411,1084.69 v1(411,1088)
NetD8_A: D8.A R17.2 | length 95.9
  Top Layer w5.91: D8.A 1920,397.39 R17.2
NetD9_A: D9.A R21.2 | length 93.9
  Top Layer w5.91: D9.A 1920,317.61 R21.2
NetIC4_1: IC4.1 R18.1 R19.2 | length 162.3
  Top Layer w5: R19.2 R18.1 1131.5,1359.5 1144,1347 1159.94,1347 IC4.1
NetIC4_3: IC4.3 R20.1 U2.39 | length 420.9
  Top Layer w5: R20.1 1007.18,1289.5 1022.4,1274.29 1022.4,1273.3 1035.04,1260.66 1116,1260.66 IC4.3 1126,1258.31 1135.31,1249 1323.98,1249 1347.69,1225.28 U2.39
NetIC7_1: IC7.1 R38.2 R40.1 | length 187.2
  Top Layer w5: IC7.1 1814.37,1659.63 1827,1647 1827,1628 1832,1623 R38.2 R40.1
NetIC7_2: IC7.2 R37.2 R39.1 | length 162.5
  Top Layer w5: IC7.2 1858.82,1679.31 R37.2 R39.1
NetJ1_A5: J1.A5 R1.1 | length 136.4
  Top Layer w5: J1.A5 409.01,1629.21 R1.1
NetJ1_B5: J1.B5 R2.2 | length 136.6
  Top Layer w5: J1.B5 408.43,1511.1 R2.2
NetJ10_1: J10.1 U2.32 | length 163
  Top Layer w5: U2.32 1866.84,1018.88 J10.1
NetR17_1: R17.1 U2.41 | length 1097.9
  Top Layer w5.91: U2.41 1261.08,1033.92 1487,808 1487,654.08 1595.08,546 1615,546 1769,392 R17.1
NetR21_1: R21.1 U2.42 | length 1201.8
  Top Layer w5: U2.42 1217.77,1036.23 1465.5,788.5 1465.5,641.5 1581,526 1612,526 1703,435 1703,371 1750,324 1861.4,324 R21.1
NRST: C4.1 IC1.3 R3.1 S1.1 S1.2 U1.14 | length 2761.3
  Top Layer w5: IC1.3 687,2158.06 722,2123.06 v1(722,2002) 1008.27,2288.27 1490.73,2288.27 1572.5,2206.5 R3.1 ; v1(658,1244) 709,1244 762,1191 U1.14 ; C4.1 1606,2154.57 R3.1 ; S1.2 1692.09,2258 1680.81,2269.28 1680.81,2276.88 1661.95,2295.75 1647.45,2295.75 1643.49,2299.71 1582.12,2299.71 1574.8,2292.39 1574.8,2236.72 1605.02,2206.5 R3.1
  Bottom Layer w5: v1(658,1244) 658,1819 674,1835 700,1835 722,1857 v1(722,2002)
RO: IC1.11 J2.16 | length 2045
  Top Layer w5: IC1.11 635.5,1755 v1(745,1755) ; v1(747,431) 747,429 817,359 1173,359 1244,288 J2.16
  Bottom Layer w5: v1(745,1755) 746,1754 746,432 v1(747,431)
SIM_CLK: J8.C3 U2.16 | length 305
  Top Layer w5: v1(1346,689) 1347.31,687.69 1347.31,473.99 U2.16
  Bottom Layer w5: v1(1346,689) 1429.28,689 J8.C3@1433.28,693
SIM_DATA: J8.C7 U2.15 | length 288.8
  Top Layer w5: U2.15 1304.39,625.39 v1(1323,644)
  Bottom Layer w5: v1(1323,644) 1432.28,644 J8.C7@1433.28,643
SIM_DET: J8.C6 U2.14 | length 408.5
  Top Layer w5: U2.14 1261.08,685.08 1320,744 v1(1324,744)
  Bottom Layer w5: v1(1324,744) 1432.28,744 J8.C6@1433.28,743
SIM_EN: IC1.26 R18.2 | length 315.6
  Top Layer w5: R18.2 1194.5,1449.5 1252,1507 1252,1633 1277.06,1658.06 IC1.26
SIM_RST: J8.C2 U2.17 | length 436.1
  Top Layer w5.91: v1(1346,794) 1379,794 1391,782 U2.17
  Bottom Layer w5.91: v1(1346,794) 1422.28,794 J8.C2
SIM_RX: IC1.27 U2.1 | length 874.2
  Top Layer w5: U2.1 1078.91,1063.09 1185.09,1063.09 v1(1186,1064) ; v1(1210.69,1707) 1320.37,1707 IC1.27
  Bottom Layer w5: v1(1186,1064) 1212,1090 1212,1705.69 v1(1210.69,1707)
SIM_TX: IC1.28 U2.2 | length 956.8
  Top Layer w5: U2.2 1079.57,1020.44 1184.44,1020.44 v1(1186,1022) ; v1(1242,1761) 1318.48,1761 IC1.28
  Bottom Layer w5: v1(1186,1022) 1194,1022 1235,1063 1235,1748.96 1242,1755.96 v1(1242,1761)
SIM_VDD: C24.2 C25.2 J8.C1 U2.18 | length 808.5
  Top Layer w5: v1(1280,830) 1385,830 1434.31,780.69 U2.18 1434.31,379.31 C25.2 C24.2
  Bottom Layer w5: v1(1280,830) 1346,896 1420.28,896 J8.C1
TMP: IC1.16
U0TXD_MTDO_P_CTL: IC1.23
USB_N: D3.2 J1.A7 J1.B7 U1.6 | length 759.8
  Top Layer w5.91: J1.B7 238.49,1609.53 233.26,1614.76 198.19,1614.76 ccw(c198.19,1590) 198.19,1565.24 233.26,1565.24 238.18,1570.16 J1.A7 274.83,1570.98 301.81,1570.98 302.88,1572.05 415.43,1572.05 446.56,1540.92 479.04,1540.92 482.5,1537.46 ; D3.2 482.5,1517.36 482.5,1537.46 ; U1.6 612,1382.8 621.24,1392.04 625.53,1392.04 629.05,1395.56 629.05,1459.95 548.08,1540.92 485.96,1540.92 482.5,1537.46
USB_P: D2.2 J1.A6 J1.B6 U1.5 | length 758.6
  Top Layer w5.91: v1(198.19,1540) 223,1540 224.73,1541.73 226.39,1543.39 235.63,1543.39 242.71,1550.47 J1.B6 ; v1(198.19,1590) 223,1590 223.08,1589.92 273.93,1589.92 J1.A6 274.83,1589.02 301.81,1589.02 302.88,1587.95 422.02,1587.95 453.15,1556.83 479.04,1556.83 482.5,1560.29 ; D2.2 482,1560.79 482.5,1560.29 ; U1.5 662,1382.8 652.76,1392.04 648.47,1392.04 644.95,1395.56 644.95,1466.54 554.67,1556.83 485.96,1556.83 482.5,1560.29
  Bottom Layer w5.91: v1(198.19,1540) v1(198.19,1590)
USB_VBUS: C1.2 D1.2 J1.A4_B9 J1.B4_A9 J2.11 SJ1.1 SJ2.1 U1.16 | length 3005
  Top Layer w10: SJ1.1 277,1322 322,1367 D1.2 ; SJ2.1 258,1860 337,1781 337,1697 314.49,1674.49 J1.A4_B9 269.32,1669.8 245.35,1669.8 242.52,1666.97 187.97,1666.97 141.99,1620.99 141.99,1539.01 187.97,1493.03 242.52,1493.03 245.35,1490.2 269.32,1490.2 J1.B4_A9 332.49,1485.51 374.02,1443.98 D1.2 ; v1(918,1109) 918,1152.73 ; C1.2 944.35,1152.73 918,1152.73 ; D1.2 374.02,1339.98 439,1275 714,1275 755,1234 834,1234 862,1206 U1.16 918,1152.73
  Bottom Layer w10: v1(918,1109) 918,452 1090,280 1090,176 1053,139 J2.11
pads on no net: IC1.4 IC1.5 IC1.14 IC1.17 IC1.18 IC1.19 IC1.20 IC1.21 IC1.22 IC1.24 IC1.29 IC1.31 IC1.32 IC1.33 IC3.4 J1. J1.A8 J1.B8 J2.7 J2.9 J8.SW PS1.5 S1.G1 S2.G1 U1.7 U1.8 U1.9 U1.10 U1.11 U1.12 U1.15 U2.3 U2.4 U2.5 U2.6 U2.7 U2.9 U2.10 U2.11 U2.12 U2.20 U2.22 U2.23 U2.24 U2.25 U2.26 U2.28 U2.29 U2.38 U2.40

## Polygon pours and split planes (outlines as drawn)
GND on Top Layer "GND_L01_P007" (solid, pour order 7): 1936.02,2323.48 cw(c1936.02,2273.48) 1986.02,2273.48 1986.02,54.48 cw(c1937.02,54.48) 1937.02,5.48 54.02,5.48 cw(c54.02,55.48) 4.02,55.48 4.02,2274.48 cw(c53.02,2274.48) 53.02,2323.48
GND on Top Layer "GND_L01_P005" (solid, pour order 5): 1936,2324 cw(c1936,2274) 1986,2274 1986,55 cw(c1937,55) 1937,6 54,6 cw(c54,56) 4,56 4,2275 cw(c53,2275) 53,2324
+4.1V on Top Layer "+4.1V_L01_P001" (solid, pour order 1): 1456,1296 1498,1254 1499,1228 1499,1141 1513,1127 1515.64,1127 1515.92,1126.72 1576.48,1126.72 1593,1143.23 1593,1281.5 1607.5,1296 1729,1296 1736,1303 1736,1418 1729,1425 1476,1425 1448,1453 1448,1461 1437,1472 1374,1472 1358,1456 1358,1311 1373,1296
+4.1V on Top Layer "+4.1V_L01_P002" (solid, pour order 2): 321.43,1101.57 359,1064 1001,1064 1032.15,1032.85 1032.15,858.15 1010,836 955,836 934,857 934,966 912,988 321,988 297,964 177,964 173,968 173,1232 189,1248 308.94,1248 321.43,1235.5
GND on Bottom Layer "GND_L04_P003" (solid, pour order 3): 1936,2324 cw(c1936,2274) 1986,2274 1986,55 cw(c1937,55) 1937,6 54,6 cw(c54,56) 4,56 4,2275 cw(c53,2275) 53,2324
+4.1V on Bottom Layer "+4.1V_L04_P000" (solid, pour order 0): 1008,851 1017,860 1017,891 1027,901 1235,901 1409,1075 1409,1288 1433,1312 1433,1457 1417,1473 1370,1473 1352,1455 1352,1316 1369,1299 1369,1089 1220,940 1026,940 1017,949 1017,1042 1009,1050 959,1050 946,1037 946,860 955,851
GND on GND_SIG "GND_L03_P004" (solid, pour order 4): 1936,2324 cw(c1936,2274) 1986,2274 1986,55 cw(c1937,55) 1937,6 54,6 cw(c54,56) 4,56 4,2275 cw(c53,2275) 53,2324
GND on GND "GND_L02_P006" (solid, pour order 6): 1936.02,2324.48 cw(c1936.02,2274.48) 1986.02,2274.48 1986.02,55.48 cw(c1937.02,55.48) 1937.02,6.48 54.02,6.48 cw(c54.02,56.48) 4.02,56.48 4.02,2275.48 cw(c53.02,2275.48) 53.02,2324.48

## Silkscreen, mask and mechanical layers (free items; w line width, h text height)
Top Overlay:
  drawing of 61 lines, arcs and shapes, not listed
  text "RST" at 1911,2050 h15
  text "BOOT" at 1896,1792 h15
  text "GSM ANT" at 1871,906 h15
  text "NET" at 1855,543 h15 r270
  text "I2C" at 869,379 h15
  text "RS485" at 1537,330 h15
  text "V_IN" at 512,318.5 h15
  text "5 V" at 618,318.5 h15
  text "3V3" at 723,318.5 h15
  text "CLK" at 854.72,307.92 h15 r90
  text "SDA" at 946.72,307.92 h15 r90
  text "F-IN" at 1053,307 h15 r90
  text "DAC" at 1141.72,307 h15 r90
  text "RO" at 1224,307 h15
  text "DI" at 1321,307 h15
  text "DE" at 1434,307 h15
  text "STATUS" at 1855,238 h15 r270
  text "V_USB" at 1007,57.5 h15
  text "1" at 1137,51 h15
  text "2" at 1232.67,51 h15
  text "3" at 1333.33,51 h15
  text "4" at 1434,51 h15
  text "GND" at 629,26 h15
  text "ADC" at 1490,26 h15
Mechanical 15:
  the board outline again, w10